# Altium PCB Mini_PCB_V1.PcbDoc
Units mm, origin at the board's own origin, x right, y up, seen from the top; angles counter-clockwise.
Board outline 56.5 x 56.5 mm, 2 copper layers (Top Layer, Bottom Layer), stack 1.071 mm thick; 39 components, 26 nets, 158 pads, 42 vias.
Unrouted connection lines stored in the file: 3.
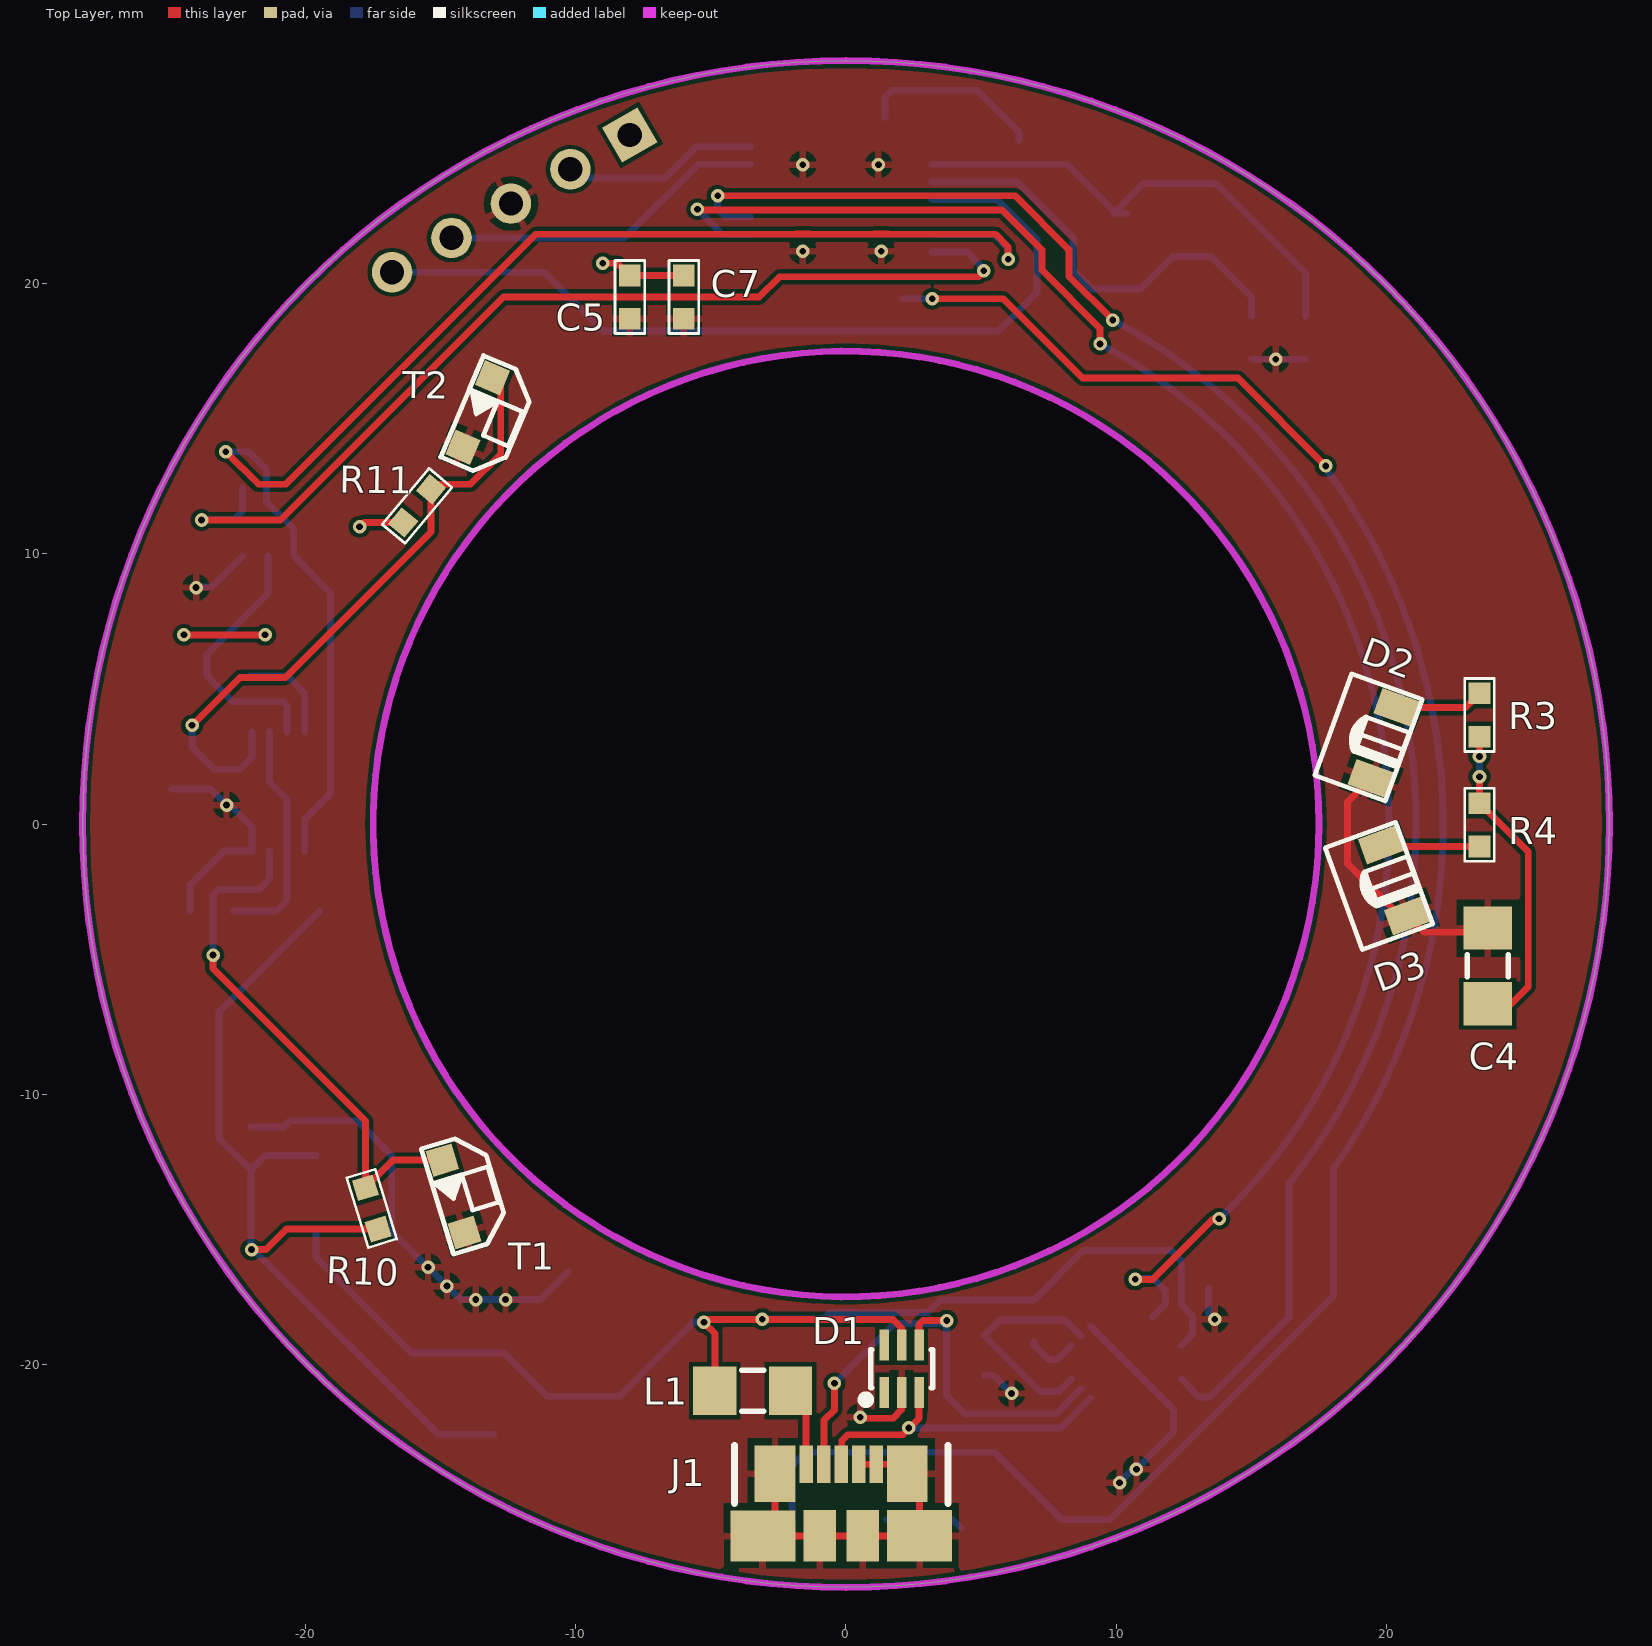
[diagram p0: Top Layer view]
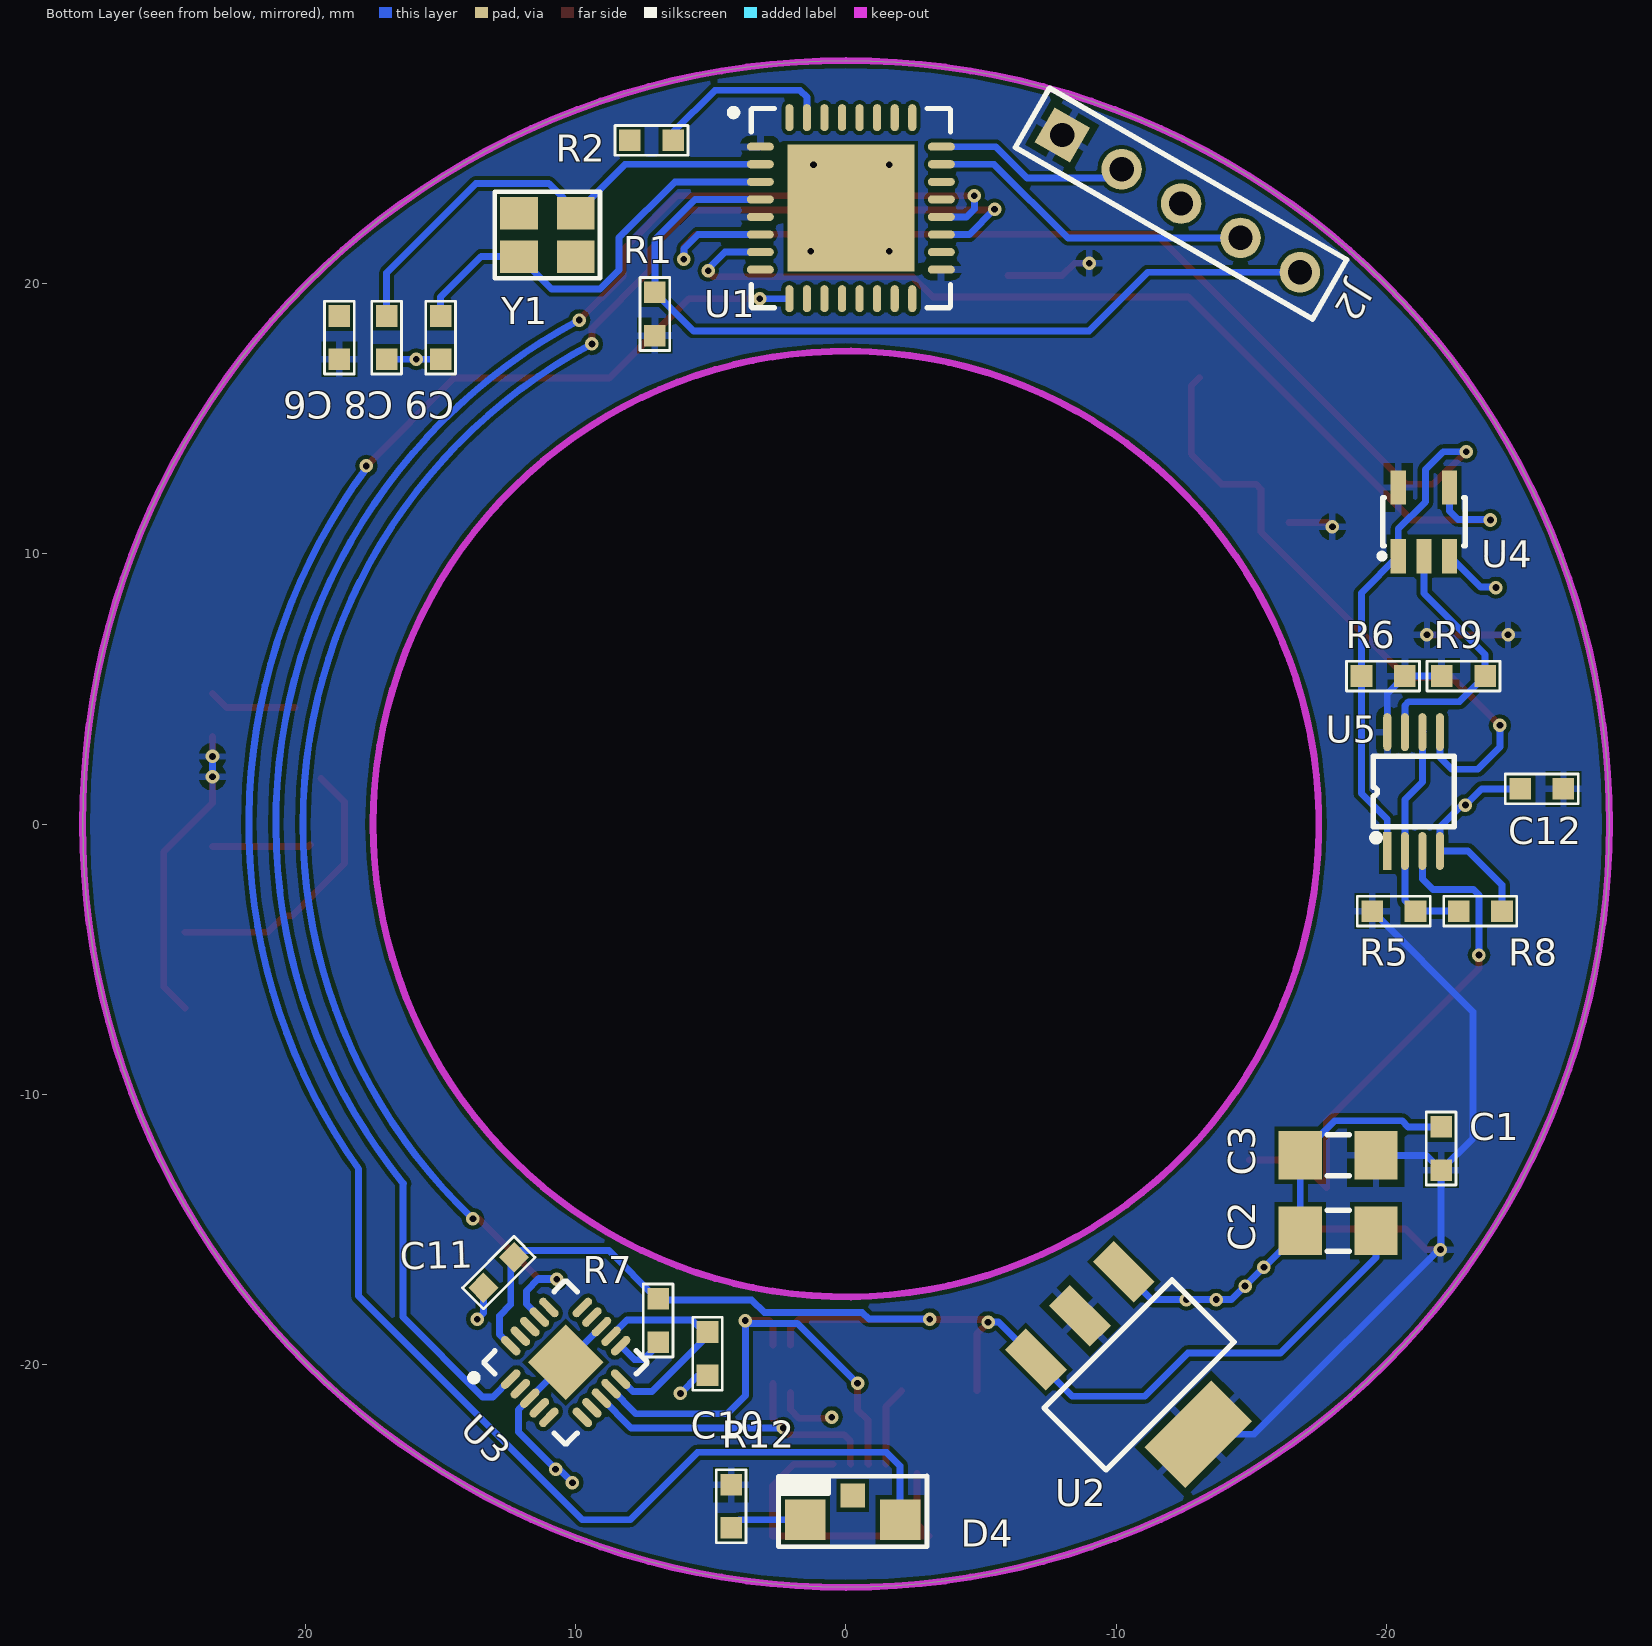
[diagram p1: Bottom Layer view, seen from below]
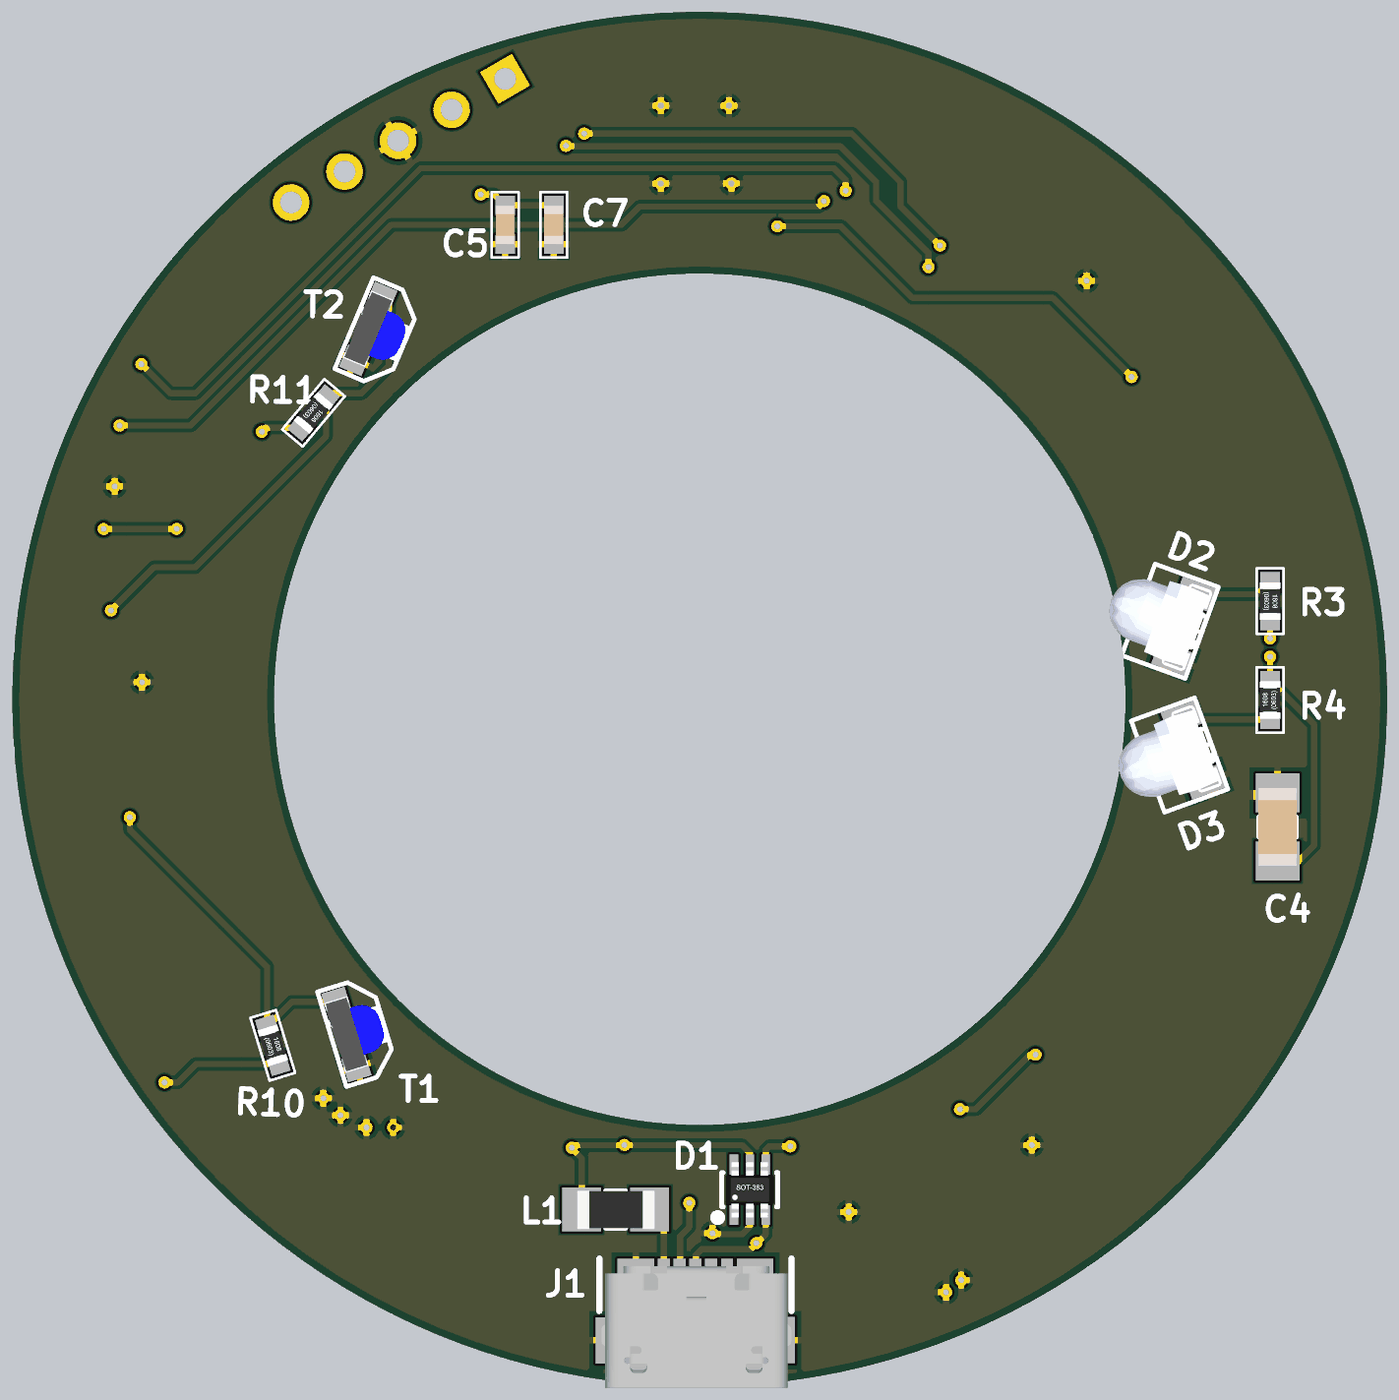
[diagram p2: 3D render of the assembled board from above, using the file's embedded part models]
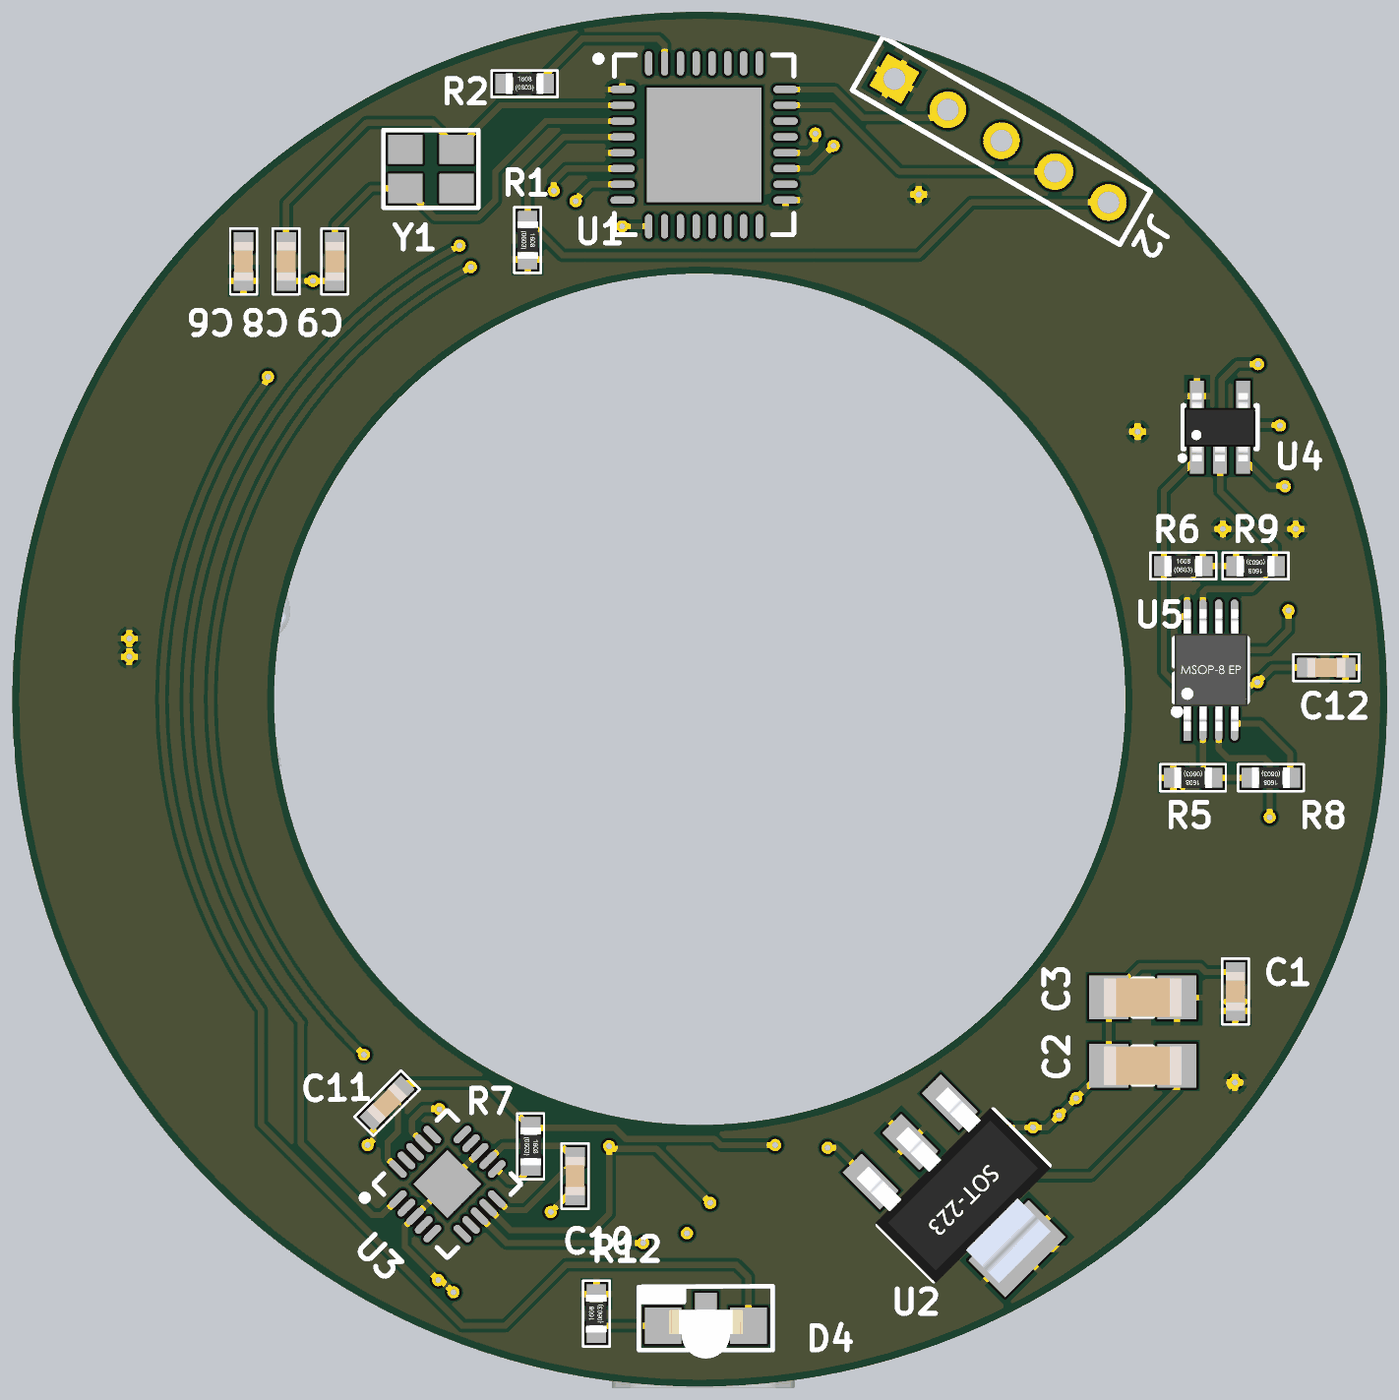
[diagram p3: 3D render of the assembled board from below, using the file's embedded part models]

## Layer stack, top to bottom
Top Solder: solder mask 0.0102, Solder Resist, Dk 3.5
Top Layer: signal copper 0.0356
Dielectric 1: core 1, FR-4, Dk 4.2
Bottom Layer: signal copper 0.0356
Bottom Solder: solder mask 0.0102, Solder Resist, Dk 3.5

## Board outline
-28.25,0 ccw(c0,0) 0,-28.25 ccw(c0,0) 28.25,0 ccw(c0,0) 0,28.25 ccw(c0,0)
cut-out: -17.5,0 ccw(c0,0) 0,-17.5 ccw(c0,0) 17.5,0 ccw(c0,0) 0,17.5 ccw(c0,0)

## Design rules (kind name [scope] priority, off if disabled: settings)
Clearance [All] p1: gap=0.15
PolygonConnect [All] p1: connectstyle=Relief reliefconductorwidth=0.254 reliefentries=4 polygonreliefangle="90 Angle" airgapwidth=0.254
RoutingVias [All] p1: holewidth=0.711 width=1.27 viastyle="Through Hole" minholewidth=0.711 minwidth=1.27 maxholewidth=0.711 maxwidth=1.27
SolderMaskExpansion [All] p1: expansion=0.102
Width [All] p1: maxlimit=0.254 minlimit=0.254 preferedwidth=0.254
30 further rules are at their usual default settings.

## Components (designator, comment, footprint, x,y, rotation, side; value= is the part's Value field where it differs from the comment)
C1 "Cap_100nF_16V" 0603_CAP -22.022,-12.008 r90 bottom
C2 "Cap_10uF_16V" 1206_CAP -18.212,-15.056 r0 bottom
C3 "Cap_10uF_16V" 1206_CAP -18.212,-12.262 r0 bottom
C4 "10uF 35V" 1206_CAP 23.75,-5.25 r270 top
C5 "100nF 50V" 0603_CAP -8,19.5 r90 top
C6 "100nF 50V" 0603_CAP 18.75,18 r270 bottom
C7 "100nF 50V" 0603_CAP -6,19.5 r90 top
C8 "22pF 50V" 0603_CAP 17,18 r90 bottom
C9 "22pF 50V" 0603_CAP 15,18 r90 bottom
C10 "Cap_100nF_16V" 0603_CAP 5.125,-19.6 r270 bottom
C11 "100nF 50V" 0603_CAP 12.85,-16.6 r135 bottom
C12 "100nF 50V" 0603_CAP -25.75,1.3 r180 bottom
D1 "RCLAMP0504F.TCT" SC70-6 2.057,-20.161 r0 top
D2 "SFH 4045N" 1506_LED_ANGLE 19.431,1.683 r70 top
D3 "SFH 4045N" 1506_LED_ANGLE 20.777,-3.397 r110 top
D4 "PG1101F-TR" PG1101F -2,-25.75 r180 bottom
J1 "USB Micro B_SM_473461001" "USB MICRO-B TOP_SM_MOLEX_47346-0001" -0.178,-23.692 r180 top
J2 "SWD" HDR1X5 -8,25.5 r210 bottom
L1 "BLM31PG500SN1L" 1206_IND -3.455,-20.974 r180 top
R1 "10k 1%" 0603_Res 7.075,18.875 r270 bottom
R2 "1K00 1%" 0603_Res 7.2,25.3 r180 bottom
R3 "100R 1%" 0603_Res 23.444,4.032 r270 top
R4 "100R 1%" 0603_Res 23.444,-0.032 r90 top
R5 "10k 1%" 0603_Res -20.275,-3.225 r0 bottom
R6 "4k7 1%" 0603_Res -19.875,5.475 r180 bottom
R7 "10k 1%" 0603_Res 6.95,-18.375 r270 bottom
R8 "20k 1%" 0603_Res -23.475,-3.225 r0 bottom
R9 "4k7 1%" 0603_Res -22.85,5.475 r0 bottom
R10 "4k7 1%" 0603_Res -17.55,-14.225 r287 top
R11 "4k7 1%" 0603_Res -15.875,11.775 r230 top
R12 "200R 1%" 0603_Res 4.25,-25.25 r90 bottom
T1 "PT12-21C" PTran_side -14.935,-12.44 r287 top
T2 "PT12-21C" PTran_side -13.081,16.516 r247 top
U1 "STM32F042" QFN65P700X700X100_HS-33N -0.178,22.79 r180 bottom
U2 "LD1117S33CTR-3.3V" SOT-223 -10.846,-20.39 r315 bottom
U3 "FT231X" QFN50P400X400X80_HS-21N 10.375,-19.925 r135 bottom
U4 "SN74AUP1G80" SOT23-5 -21.387,11.182 r180 bottom
U5 "MCP6567-E/MS" MSOP8 -21.006,1.2 r90 bottom
Y1 "XTAL_12MHz" NXK-32 10,21 r0 bottom

## Footprints (in the part's own frame and the unit in brackets; to place one, negate y for a bottom-side part, rotate by r counter-clockwise, add the part's x,y. Pads: shape width x height; smd on the part's side, far side on the other; paste and mask are expansions set on the pad)
0603_CAP [mm]
  rect 0.8x0.8 smd: 1(-0.8,0) 2(0.8,0)
  silkscreen extent -1.35,-0.55 1.35,0.55, body extent -0.8,-0.4 0.8,0.4, height 0.8
0603_Res [mm] "Resistor"
  rect 0.8x0.8 smd: 1(-0.8,0) 2(0.8,0)
  silkscreen extent -1.35,-0.55 1.35,0.55, body extent -0.77,-0.42 0.78,0.43, height 0.45
1206_CAP [mm]
  rect 1.6x1.8 smd: 1(-1.4,0) 2(1.4,0)
  silkscreen extent -0.41,-0.76 0.41,0.76, body extent -1.6,-0.8 1.6,0.8, height 0.79
1206_IND [mm]
  rect 1.6x1.8 smd: 1(-1.4,0) 2(1.4,0)
  silkscreen extent -0.41,-0.76 0.41,0.76, body extent -1.61,-0.79 1.59,0.81, height 1.5
1506_LED_ANGLE [mm]
  rect 1x1.5 smd: 1(0,0) 2(2.8,0)
  silkscreen extent -0.6,-0.77 3.4,2, body extent -0.37,-0.64 3.17,3.19, height 2.8
HDR1X5 [mm]
  rect 1.5x1.5 hole 0.9: 1(0,0)
  round 1.5 hole 0.9: 2(2.54,0) 3(5.08,0) 4(7.62,0) 5(10.16,0)
  silkscreen extent -1.27,-1.27 11.43,1.27
MSOP8 [mm]
  rect 1.4x0.3 smd: 1(-2.2,0.975)
  oval 1.4x0.3 smd: 2(-2.2,0.325) 3(-2.2,-0.325) 4(-2.2,-0.975) 5(2.2,-0.975) 6(2.2,-0.325) 7(2.2,0.325) 8(2.2,0.975)
  silkscreen extent -1.84,-1.5 1.3,1.52, body extent -2.5,-1.51 2.5,1.49, height 1.09
NXK-32 [mm]
  rect 1.4x1.2 smd: 1(0,-1.6) 2(2.1,0) 3(2.1,-1.6) 4(0,0)
  silkscreen extent -0.9,-2.4 3,0.8
PG1101F [mm]
  rect 1.5x1.5 smd: 1(0,0) 2(-3.5,0)
  rect 0.9x0.9 smd: 9(-1.75,0.9)
  silkscreen extent -4.5,-1 1,1.63, body extent -3.25,-1.35 -0.25,0.67, height 1.06
PTran_side [mm]
  rect 1x1 smd: 1(0,0) 2(2.8,0)
  silkscreen extent -0.62,-0.63 3.45,1.6, body extent -0.1,-0.5 2.9,1.5, height 1
QFN50P400X400X80_HS-21N [mm] "QFN, 20-Leads, Body 4,00x4,00mm, Pitch 0,50mm, Thermal Pad 1,98x1,98mm, IPC Medium Density"
  oval 0.9x0.3 smd: 1(-1.875,1) 2(-1.875,0.5) 3(-1.875,0) 4(-1.875,-0.5) 5(-1.875,-1) 11(1.875,-1) 12(1.875,-0.5) 13(1.875,0) 14(1.875,0.5) 15(1.875,1)
  oval 0.3x0.9 smd: 6(-1,-1.875) 7(-0.5,-1.875) 8(0,-1.875) 9(0.5,-1.875) 10(1,-1.875) 16(1,1.875) 17(0.5,1.875) 18(0,1.875) 19(-0.5,1.875) 20(-1,1.875)
  rect 1.98x1.98 smd: 21(0,0)
  silkscreen extent -2.92,-2.15 2.15,2.15, body extent -2,-2 2,2, height 0.8
QFN65P700X700X100_HS-33N [mm] "QFN, 32-Leads, Body 7,00x7,00mm, Pitch 0,65mm, Thermal Pad 4,70x4,70mm, IPC Medium Density"
  oval 1x0.3 smd: 1(-3.35,2.275) 2(-3.35,1.625) 3(-3.35,0.975) 4(-3.35,0.325) 5(-3.35,-0.325) 6(-3.35,-0.975) 7(-3.35,-1.625) 8(-3.35,-2.275) 17(3.35,-2.275) 18(3.35,-1.625) 19(3.35,-0.975) 20(3.35,-0.325) 21(3.35,0.325) 22(3.35,0.975) 23(3.35,1.625) 24(3.35,2.275)
  oval 0.3x1 smd: 9(-2.275,-3.35) 10(-1.625,-3.35) 11(-0.975,-3.35) 12(-0.325,-3.35) 13(0.325,-3.35) 14(0.975,-3.35) 15(1.625,-3.35) 16(2.275,-3.35) 25(2.275,3.35) 26(1.625,3.35) 27(0.975,3.35) 28(0.325,3.35) 29(-0.325,3.35) 30(-0.975,3.35) 31(-1.625,3.35) 32(-2.275,3.35)
  rect 4.7x4.7 smd: 33(0,0)
  silkscreen extent -4.47,-3.69 3.69,3.69, body extent -3.54,-3.54 3.54,3.54, height 1
SC70-6 [mm]
  rect 0.35x1.15 smd: 1(-0.65,-0.875) 2(0,-0.875) 3(0.65,-0.875) 4(0.65,0.875) 5(0,0.875) 6(-0.65,0.875)
  silkscreen extent -1.37,-1.19 1.15,0.7, body extent -1,-1.13 1,1.13, height 1
SOT23-5 [mil]
  rect 22x50 smd: 1(-37.4,-50) 2(0,-50) 3(37.4,-50) 4(37.4,50) 5(-37.4,50)
  silkscreen extent -65,-54 60,35, body extent -57,-55 57,55, height 57
SOT-223 [mm]
  rect 1.1x2.15 smd: 1(-2.3,-3.1) 2(0,-3.1) 3(2.3,-3.1)
  rect 3.5x2.15 smd: 4(0,3.1)
  silkscreen extent -3.35,-1.62 3.35,1.62, body extent -3.33,-3.61 3.37,3.59, height 1.85
"USB MICRO-B TOP_SM_MOLEX_47346-0001" [mm] "Molex top side, smd, micro usb B."
  rect 2.4x1.9 smd: 0(-2.9,2.65) 0(2.9,2.655)
  rect 1.5x2.1 smd: 0(-2.45,0.35) 0(2.45,0.35)
  rect 1.2x1.9 smd: 0(-0.8,2.65) 0(0.8,2.65)
  rect 0.5x1.4 smd: 1(1.3,0) 2(0.65,0) 3(0,0) 4(-0.65,0) 5(-1.3,0)
  silkscreen extent -3.95,-0.7 3.95,1.45, body extent -3.94,-0.39 3.86,4.61, height 2.66

## Part data
C1 C10: "100nF 0603 10% 16V X7R CC0603KPX7R7BB104 (YAG) [82-04-85]"
C2 C3: "10uF 1206 10% 16V X7R CL31B106KOHNNNE (SAM) [82-08-01]"
C4: library part Cap_10uF, "CAP CER 10UF 35V Y5V 1206"
C5 C6 C7 C11 C12: library part Cap_100nF, "100nF 0603 10% 50V X7R CC0603KRX7R9BB104 (YAG) [82-06-23]"
C8 C9: library part Cap_22pF, "22pF 0603 5% 50V NP0 CC0603JRNPO9BN220 (YAG) [82-02-18]"
D1: "SEMTECH - RCLAMP0504F.TCT - DIODE, TVS, 5V"
D2 D3: library part SFH_4045, "SFH 4045N High Power Infrared Emitter (940 nm)"
D4: "LED GREEN CLEAR 1208 R/A SMD"
J1: "MOLEX - 548190519 - MINI USB TYPE B, RECEPTACLE, THT"
J2: "STM SWD PROGRAMMER CONNECTOR"
L1: library part Fer_50R@100MHz, "FERRITE CHIP 50 OHM 3500MA 1206"
R1 R5 R7: library part Res_10k, "10K0 0603 1% CR-03FL7---10K 0.1W (VIK) [80-11-68]"
R2: library part Res_1k, "1K00 0603 1% RC0603FR-13 1K00 0.1W (YAG) [80-15-07]"
R3 R4: library part Res_100R, "100R 0603 1% CR-03FL7--100R 0.1W (VIK) [80-11-53]"
R6 R9 R10 R11: library part Res_4k7, "4K70 0603 1% CR-03FL7---4K7 0.1W (VIK) [80-11-85]"
R8: library part Res_20k_1%, "20K0 0603 1% CR-03FL7---20K 0.1W (VIK) [80-14-52]"
R12: library part Res_200R_1%, "200R 0603 1% CR-03FL7--200R 0.1W (VIK) [80-14-37]"
T1 T2: library part PT12-21C/TR8, "PHOTOTRANSISTOR WATER CLR RA SMD"
U1: library part STM32F042K6U6, "32 Bit Microcontroller, USB Line, ARM Cortex-M0, 48 MHz, 32 KB, 6 KB, 32, UFQFN"
U2: "LD1117S33CTR (STM) FIX 3.3V 0.95A LDO.VOLT.REG. SOT-223 -40+150°C [89-06-98]"
U3: "FT232RL (FTD) USB UART IC SSOP-28 [89-21-46]"
U4: library part SN74AUP1G80DBVR, "TEXAS INSTRUMENTS - SN74AUP1G80DBVR - IC, FLIP-FLOP, DTYPE, CMOS, 5TSOP"
U5: "Analogue Comparator, Dual, Low Power, 2, 34 ns, 1.8V to 5.5V, MSOP, 8"
Y1: "12.000000MHz QUARZ HC49/SMD (NSK) ½30ppm LOW PROFILE SMD [40-01-25]"

## Via types
v1: diameter 0.5, hole 0.25, Top Layer to Bottom Layer, 42 vias

## Nets (pads, with @x,y where several pads share a name; then routed paths per layer and width w, separated by ;. In a path a pad name is that pad's centre, name@x,y a point inside that pad or via, vN(x,y) a via of type N, cw(c..) or ccw(c..) an arc to the next point about the centre after c; other vN are vias at no path point)
+3V3: C1.1 C3.1 C4.2 C5.2 C6.2 C7.2 C12.2 J2.1 R1.2 R3.2 R4.2 R5.2 R6.2 R9.2 R10.2 R11.2 R12.2 U1.1 U1.5 U1.17 U2.2 U2.4 U4.5 U5.8 | length 56.6
  Top Layer w0.254: v1(-24.5,7) v1(-21.5,7) ; v1(-22,-15.75) -21.467,-15.75 -20.707,-14.99 R10.2 ; v1(-18,11) -17.838,11.162 R11.2 ; v1(-9,20.75) -8.45,20.75 C5.2 C7.2 ; v1(23.444,1.75) R4.2 25.25,-1.038 25.25,-6.014 C4.2@24.46,-6.804 ; v1(23.444,2.5) R3.2
  Bottom Layer w0.254: R9.2 R6.2 -20.031,4.831 U5.8 ; C3.1 -21.476,-12.262 C1.1 ; R5.2 -23.2,-6.95 -23.2,-11.63 C1.1 ; U2.4 -15.106,-22.582 -22.022,-15.666 C1.1 ; v1(23.444,1.75) v1(23.444,2.5)
A_LED: D4.1 U1.9 | length 77.4
  Top Layer w0.254: v1(3.19,19.44) 5.81,19.44 8.75,16.5 14.5,16.5 v1(17.75,13.25)
  Bottom Layer w0.254: D4.1 -2,-23.75 -1.5,-23.25 5.5,-23.25 8,-25.75 9.75,-25.75 18.034,-17.466 18.034,-12.774 ccw(c0,0) v1@17.71,13.22 ; U1.9 v1(3.19,19.44)
DIR: U1.7 U4.4 | length 37.6
  Top Layer w0.254: v1(-23.85,11.25) -20.925,11.25 -12.675,19.5 -3.211,19.5 -2.461,20.25 4.9,20.25 v1@5.15,20.5
  Bottom Layer w0.254: v1(-23.85,11.25) -23.825,11.275 -22.65,11.275 -22.337,11.588 U4.4 ; U1.7 4.485,21.165 v1@5.15,20.5
  other v1: 5.1,20.475
FREQ: R6.1 U1.6 U4.1 U5.1 | length 54.7
  Top Layer w0.254: v1(-22.95,13.775) -21.75,12.575 -20.725,12.575 -11.475,21.825 -1.867,21.825 -1.861,21.831 -1.339,21.831 -1.333,21.825 1.033,21.825 1.039,21.831 1.561,21.831 1.567,21.825 5.525,21.825 6,21.35 v1(6,20.9)
  Bottom Layer w0.254: v1(-22.95,13.775) -22.1,13.775 -21.45,13.125 -21.45,11.925 -20.437,10.912 U4.1 -19.075,8.55 R6.1 -19.075,1.125 -20.031,0.169 U5.1 ; U1.6 5.485,21.815 6,21.3 v1(6,20.9)
GND: C1.2 C2.2 C3.2 C4.1 C5.1 C6.1 C7.1 C8.1 C9.1 C10.2 C11.1 C12.1 D1.2 D2.1 D3.1 J1.0 J1.4 J1.5 J2.3 R2.1 R8.1 T1.2 T2.2 U1.33 U2.1 U3.3 U3.13 U3.21 U4.3 U5.4 | length 65
  Top Layer w0.254: J1.0@-2.628,-24.042 -2.628,-25.897 -3.078,-26.347 2.717,-26.347 2.722,-26.342 2.722,-24.492 2.272,-24.042 1.922,-23.692 J1.5 J1.4 ; v1(0.525,-21.95) 0.567,-21.992 1.74,-21.992 2.057,-21.675 D1.2 ; D2.1 18.563,0.814 18.563,-1.465 20.495,-3.397 D3.1 21.384,-4.004 C4.1@24.46,-4.004
  Bottom Layer w0.254: C12.1 -23.525,1.3 v1(-22.925,0.7) -22.8,0.7 -21.981,-0.119 U5.4 -23.025,-1 -24.275,-2.25 R8.1 ; v1@-24.025,8.775 -23.474,8.775 U4.3 ; C1.2 -20.797,-11.208 -20.57,-10.981 -18.093,-10.981 C3.2 C2.2 -14.268,-17.6 -11.309,-17.6 U2.1 ; C10.2 5.45,-20.4 v1(6.125,-21.075) ; U3.13 U3.21 U3.3 12.125,-21.675 12.125,-22.5 v1(10.75,-23.875) 10.625,-23.875 v1(10.125,-24.375) ; C11.1 13.416,-18.091 v1(13.65,-18.325) ; C9.1 C8.1
  other v1: -13.7,-17.6 -12.6,-17.6 -14.768,-17.1 -15.468,-16.4 -24.05,8.75 15.9,17.2 -1.6,21.2 1.3,21.2 -1.6,24.4 1.2,24.4
NetC10_1: C10.1 U3.10 U3.12 | length 8.3
  Bottom Layer w0.254: U3.10 7.886,-21 7.175,-21 5.112,-18.938 5.693,-18.357 8.1,-18.357 U3.12
NetD2_2: D2.2 R3.1 | length 3.3
  Top Layer w0.254: D2.2 22.926,4.314 R3.1
NetD3_2: D3.2 R4.1 | length 3.7
  Top Layer w0.254: D3.2 19.885,-0.832 R4.1
NetD4_2: D4.2 R12.1 | length 2.9
  Bottom Layer w0.254: D4.2 3.95,-25.75 R12.1
NetJ1_1: J1.1 L1.1 | length 3
  Top Layer w0.254: L1.1 -1.478,-21.551 J1.1
NetR2_2: R2.2 U1.31 | length 6.8
  Bottom Layer w0.254: U1.31 1.447,26.9 1.7,27.153 4.847,27.153 6.4,25.6 R2.2
NetR5_1: R5.1 R8.2 U5.2 U5.6 | length 8.7
  Bottom Layer w0.254: R8.2 R5.1 -20.681,-2.831 U5.2 -20.681,0.906 -21.331,1.556 U5.6 U5.6@-21.35,3.419
NetR7_2: R7.2 U3.11 | length 1.9
  Bottom Layer w0.254: R7.2 6.95,-19.275 7.5,-19.825 7.823,-19.825 U3.11
NetR9_1: R9.1 U4.2 U5.7 | length 9.8
  Bottom Layer w0.254: U4.2 -21.387,8.538 -23.65,6.275 R9.1 -22.7,4.525 -20.825,4.525 -20.681,4.381 U5.7
NRST: J2.5 R1.1 U1.4 | length 31.8
  Bottom Layer w0.254: J2.5 -11.17,20.42 -9,18.25 5.65,18.25 R1.1 7.075,21.625 5.585,23.115 U1.4
OSC_IN: C8.2 U1.2 Y1.1 | length 18.6
  Bottom Layer w0.254: U1.2 8.185,24.415 Y1.1 ; Y1.1@10.4,22.6 9.9,22.6 11,23.7 13.7,23.7 17,20.4 C8.2
OSC_OUT: C9.2 U1.3 Y1.2 | length 16
  Bottom Layer w0.254: U1.3 6.335,23.765 8.4,21.7 8.4,20.5 9.1,19.8 10.9,19.8 Y1.2 13.5,21 15,19.5 C9.2
S1_IN: R10.1 T1.1 U5.3 | length 19.8
  Top Layer w0.254: v1(-23.425,-4.85) -23.425,-5.354 -17.784,-10.995 R10.1 -16.764,-12.44 T1.1
  Bottom Layer w0.254: v1(-23.425,-4.85) -23.425,-2.625 -23.225,-2.425 -21.725,-2.425 -21.331,-2.031 U5.3
S2_IN: R11.1 T2.1 U5.5 | length 23.9
  Top Layer w0.254: v1(-24.2,3.65) -22.425,5.425 -20.75,5.425 -15.361,10.814 R11.1 -15.174,12.575 -13.9,12.575 -12.775,13.7 -12.775,16.21 T2.1
  Bottom Layer w0.254: v1(-24.2,3.65) -24.2,2.85 -23.375,2.025 -22.425,2.025 -21.981,2.469 U5.5
SWCLK: J2.2 U1.24 | length 7.3
  Bottom Layer w0.254: J2.2 -9.87,23.9 -6.7,23.9 -5.535,25.065 U1.24
SWDIO: J2.4 U1.23 | length 12.2
  Bottom Layer w0.254: J2.4 -8.21,21.69 -5.485,24.415 U1.23
USART_RX: U1.19 U3.17 | length 65.4
  Top Layer w0.254: v1(-5.5,22.75) -5.473,22.723 5.777,22.723 7.25,21.25 7.25,20.5 9.404,18.346 v1(9.404,17.764) ; v1(10.7,-16.85) 11.35,-16.85 13.59,-14.61 v1(13.804,-14.61)
  Bottom Layer w0.254: v1(-5.5,22.75) -4.565,21.815 U1.19 ; v1(9.404,17.764) cw(c0,0) v1(13.804,-14.61) ; U3.17 11.825,-17.768 11.825,-17.282 11.371,-16.829 11.368,-16.825 10.725,-16.825 v1(10.7,-16.85) 11.35,-16.85
USART_TX: U1.20 U3.1 | length 66.6
  Top Layer w0.254: v1(-4.75,23.25) 6.25,23.25 8.25,21.25 8.25,20.27 v1(9.872,18.648)
  Bottom Layer w0.254: v1(-4.75,23.25) -4.75,22.75 -4.465,22.465 U1.20 ; v1(9.872,18.648) cw(c0,0) 16.376,-13.306 ; U3.1 13.064,-21.2 13.45,-21.2 16.4,-18.25 16.4,-13.306
USB_DM: D1.4 J1.2 U3.9 | length 18.5
  Top Layer w0.254: J1.2 -0.809,-23.673 -0.809,-22.062 -0.427,-21.68 v1(-0.427,-20.7) ; D1.4 2.707,-18.521 2.853,-18.375 v1(3.725,-18.375)
  Bottom Layer w0.254: v1(-0.427,-20.7) 1.794,-18.479 3.621,-18.479 v1(3.725,-18.375) 3.725,-21.15 4.4,-21.825 7.768,-21.825 U3.9
USB_DP: D1.3 J1.3 U3.8 | length 12.6
  Top Layer w0.254: J1.3 -0.159,-23.673 -0.159,-22.834 0.075,-22.6 2.108,-22.6 2.707,-22.001 D1.3 D1.3@2.707,-20.706
  Bottom Layer w0.254: v1(2.325,-22.35) 7.95,-22.35 U3.8
VBUS: C2.1 C11.2 D1.5 L1.2 R7.1 U2.3 U3.20 | length 49.6
  Top Layer w0.254: v1@-5.258,-18.46 -4.855,-18.863 L1.2 ; v1(-5.258,-18.434) -5.154,-18.33 1.74,-18.33 2.057,-18.648 D1.5
  Bottom Layer w0.254: C2.1 -19.612,-16.044 -16.078,-19.577 -12.649,-19.577 -11.049,-21.177 -8.381,-21.177 U2.3 -5.638,-18.434 v1(-5.258,-18.434) ; v1(-3.1,-18.325) -0.85,-18.325 -0.6,-18.075 3.025,-18.075 3.49,-17.61 6.915,-17.61 R7.1 6.986,-17.575 8.773,-15.789 12.039,-15.789 C11.2 12.408,-16.158 12.408,-17.783 12.825,-18.2 12.825,-18.889 U3.20
pads on no net: D1.1 D1.6 D4.9 U1.8 U1.10 U1.11 U1.12 U1.13 U1.14 U1.15 U1.16 U1.18 U1.21 U1.22 U1.25 U1.26 U1.27 U1.28 U1.29 U1.30 U1.32 U3.2 U3.4 U3.5 U3.6 U3.7 U3.14 U3.15 U3.16 U3.18 U3.19 Y1.3 Y1.4

## Polygon pours and split planes (outlines as drawn)
GND on Top Layer "Top Layer-GND" (solid, remove dead copper, pour order 2): -35.711,33.636 30.558,33.636 30.558,-35.096 30.329,-35.325 30.253,-35.401 -33.12,-35.401 -33.12,31.325 -35.432,33.636 -35.482,33.636
+3V3 on Bottom Layer "Bottom _VCC" (solid, remove dead copper, pour order 4): -28.5,28.75 -28.25,28.5 28.75,28.5 28.75,-29 28.5,-29.25 28,-28.75 -29.25,-28.75 -29.25,28.5 -28.5,29.25

## Keep-outs
Keep-Out Layer:
  circle w0.254: c0,0 r17.5
  circle w0.254: c0,0 r28.25